# Altium PCB Charging Board.PcbDoc
Units mil, origin at the board's own origin, x right, y up, seen from the top; angles counter-clockwise.
Board outline 3410 x 1565 mil, 2 copper layers (Top Layer, Bottom Layer); 17 components, 14 nets, 45 pads, 2 vias.
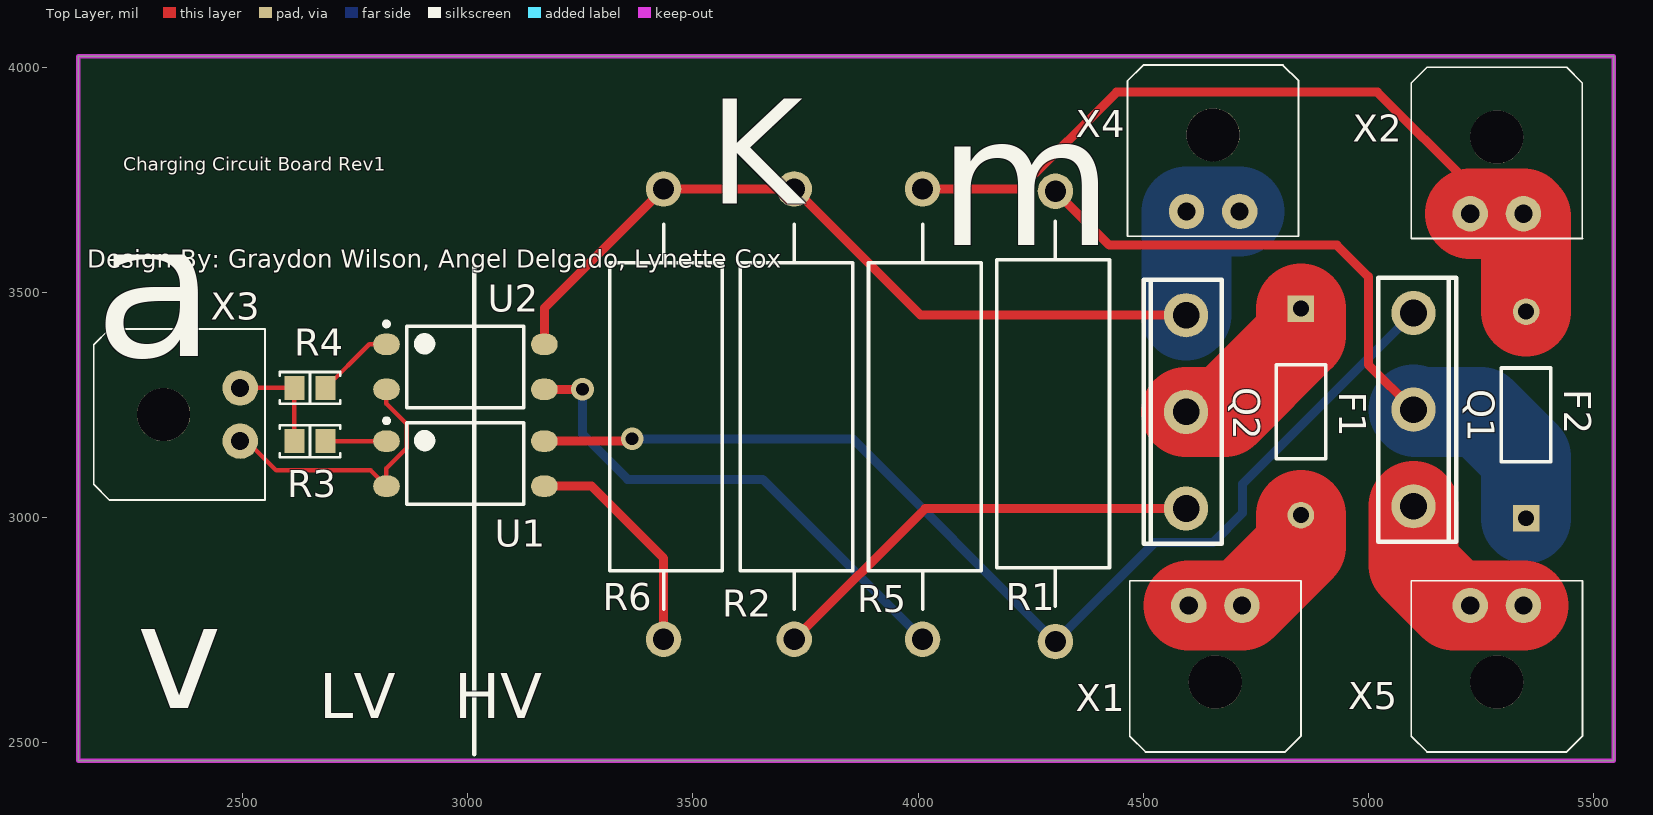
[diagram p0: Top Layer view]
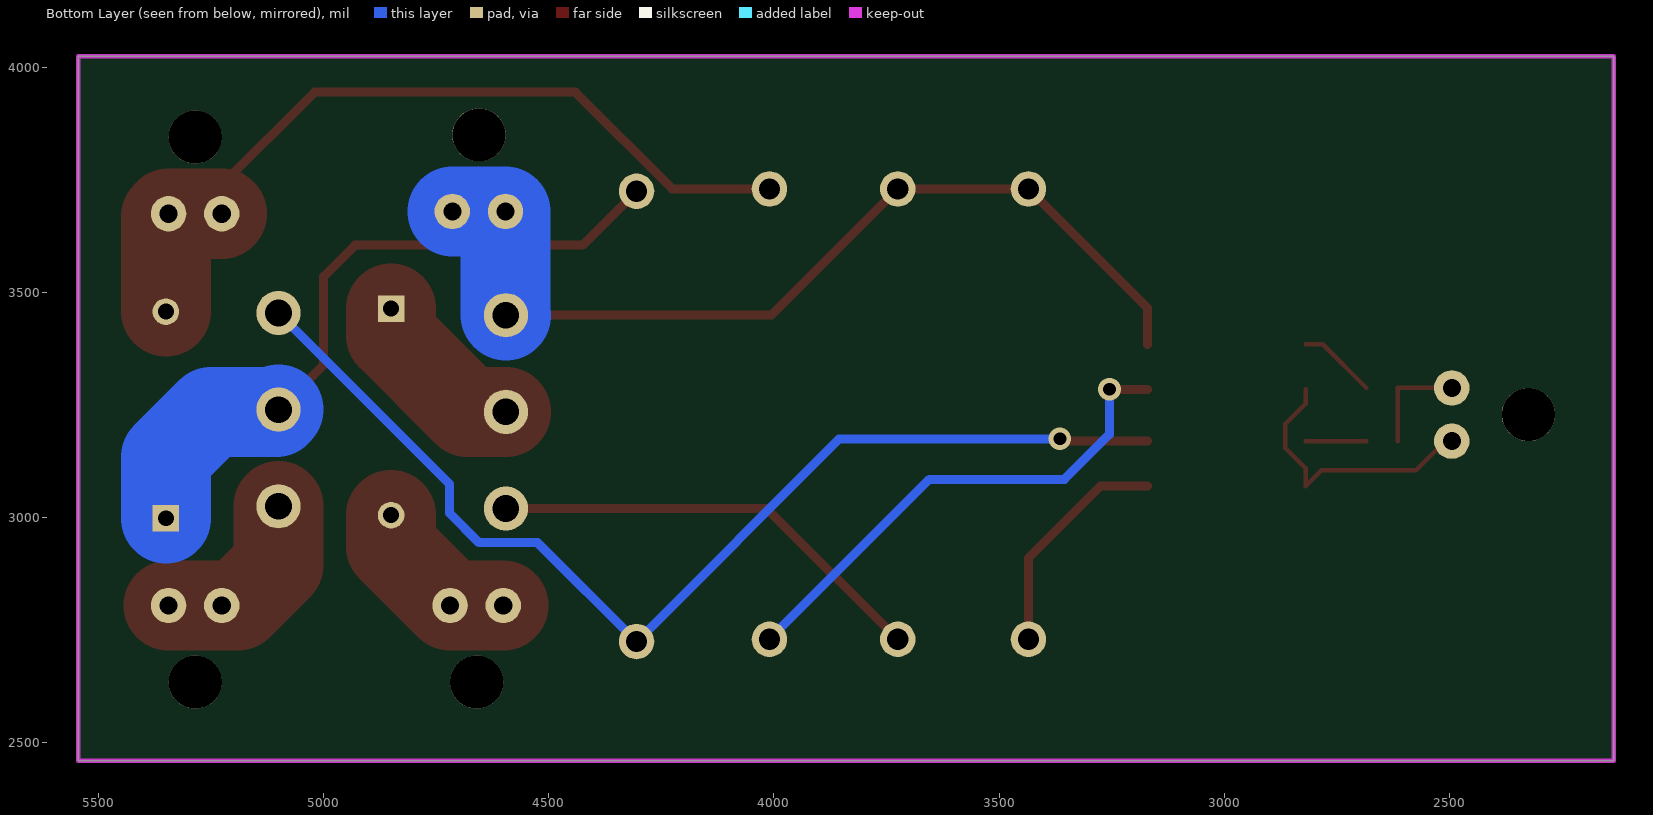
[diagram p1: Bottom Layer view, seen from below]

## Layer stack, top to bottom
Top Solder: solder mask 0.4, Solder Resist, Dk 3.5
Top Layer: signal copper 1.4
Dielectric 1: dielectric 12.6, FR-4, Dk 4.8
Bottom Layer: signal copper 1.4
Bottom Solder: solder mask 0.4, Solder Resist, Dk 3.5

## Board outline
2135,2460 5545,2460 5545,4025 2135,4025

## Design rules (kind name [scope] priority, off if disabled: settings)
Clearance [All] p1: gap=10 ignorepadtopadclearanceinfootprint=FALSE
PolygonConnect [All] p1: connectstyle=Relief reliefconductorwidth=10 reliefentries=4 polygonreliefangle="90 Angle" airgapwidth=10
RoutingVias [All] p1: holewidth=28 width=50 viastyle="Through Hole" minholewidth=28 minwidth=50 maxholewidth=28 maxwidth=50
SolderMaskExpansion [All] p1: expansion=4
Width [All] p1: maxlimit=200 minlimit=10 preferedwidth=10 minimp=50.000000 maximp=50.000000 favimp=50.000000
30 further rules are at their usual default settings.

## Components (designator, comment, footprint, x,y, rotation, side; value= is the part's Value field where it differs from the comment)
F1 "12A" PIN-W2/E2.8 4850,3235 r270 top value=6A
F2 "12A" PIN-W2/E2.8 5350,3228.11 r90 top value=6A
Q1 "STW20NK50Z" TO-247 5100,3025.43 r270 top value=N_Channel
Q2 "IXTH20P50P" TO-247 4595,3449.57 r90 top value=P_Channel
R1 "Resistor 2W TH" "Axial 25.4mm Pitch" 4305,2725 r90 top value=24k
R2 "Resistor 2W TH" "Axial 25.4mm Pitch" 3725,3730 r270 top value=24k
R3 "Resistor 820 0805 1/10W 10%" "RES 0805/2012" 2650,3170 r0 top value=880
R4 "Resistor 820 0805 1/10W 10%" "RES 0805/2012" 2650,3288.11 r0 top value=880
R5 "Resistor 2W TH" "Axial 25.4mm Pitch" 4010,3730 r270 top value=1M
R6 "Resistor 2W TH" "Axial 25.4mm Pitch" 3435,3730 r270 top value=1M
U1 "CPC1393" CPC1393GR 2995,3120 r0 top value=Null
U2 "CPC1393" CPC1393GR 2995,3335 r0 top value=Null
X1 "0436500200" "CONN 43650-0200 MOLEX 2PIN" 4660,2635 r0 top value=CONN
X2 "0436500200" "CONN 43650-0200 MOLEX 2PIN" 5285,3845 r180 top value=CONN
X3 "0436500200" "CONN 43650-0200 MOLEX 2PIN" 2324.92,3229.06 r270 top value=CONN
X4 "0436500200" "CONN 43650-0200 MOLEX 2PIN" 4655,3850 r180 top value=CONN
X5 "0436500200" "CONN 43650-0200 MOLEX 2PIN" 5285,2635 r0 top value=CONN

## Footprints (in the part's own frame and the unit in brackets; to place one, negate y for a bottom-side part, rotate by r counter-clockwise, add the part's x,y. Pads: shape width x height; smd on the part's side, far side on the other; paste and mask are expansions set on the pad)
"Axial 25.4mm Pitch" [mm]
  round 2 hole 1.2: 1(0,0) 2(25.4,0)
  silkscreen extent 2,-3.05 23.71,3.3
"CONN 43650-0200 MOLEX 2PIN" [mm] "MOLEX-43650-0200, 2PIN"
  round 2 hole 1.02: 1(-1.5,4.32) 2(1.5,4.32)
  round 3 hole 3 unplated: MH(0,0)
  silkscreen extent -4.82,-3.94 4.83,5.71
CPC1393GR [mm] "CPC1393GR, 4-Leads, Body 4.57x6.35mm, Pitch 2.54mm, IPC Medium Density"
  oval 1.5x1.2 smd: 1(-4.45,1.27) 2(-4.45,-1.27) 3(4.45,-1.27) 4(4.45,1.27)
  silkscreen extent -4.57,-2.3 3.3,2.54, body extent -4.76,-2.3 4.76,2.3, height 3.3
PIN-W2/E2.8 [mm] "Thru-Hole; 2 Leads"
  rect 1.5x1.5 hole 0.9: 1(-5.825,0)
  round 1.5 hole 0.9: 2(5.825,0)
  silkscreen extent -2.65,-1.4 2.65,1.4
"RES 0805/2012" [mm] "Chip Resistor, 2-Leads, Body 2.00x1.25mm, IPC Medium Density"
  rect 1.15x1.35 smd: 1(-0.875,0) 2(0.875,0)
  silkscreen extent -1.7,-0.9 1.7,0.9, body extent -0.95,-0.62 1.05,0.63, height 0.6
TO-247 [mm]
  round 2.5 hole 1.5: 1(-10.9,0) 2(-5.45,0) 3(0,0)
  silkscreen extent -12.9,-2 2,2.4

## Part data
F1 F2: library part 9, "Fuse", Manufacturer_id=1, MfrPartNo=2920L600/12MR, Drawer_id=1, I_hold=6A, I_max=50A, I_trip=12A, idFuse=9, LatestRevisionDate=17-Jul-2002, LatestRevisionNote="Re-released for DXP Platform.", Link=https://www.digikey.com/product-detail/en/littelfuse-inc/2920L600-12MR/F8137CT-ND/6234831, Name=2920L600/12MR, PackageDescription="Thru-Hole; 2 Leads", PackageReference=PIN-W2/E2.8, Published=8-Jun-2000, Publisher="Altium Limited", V_max=12V
Q1: library part 9, "N-Channel 500V 17A (Tc) 190W (Tc) Through Hole TO-247-3", Manufacturer_id=1, Package=TO-247, Power(Max)=190W, Supplier1PartNo=497-3261-5-ND, ComponentLink1Description=Null, ComponentLink1URL=https://www.digikey.com/product-detail/en/stmicroelectronics/STW20NK50Z/497-3261-5-ND/654635, Created_By=Lynette, Drawer_id=1, Id=17A, idFETs=9, Link=https://www.digikey.com/product-detail/en/stmicroelectronics/STW20NK50Z/497-3261-5-ND/654635, MfrPartNo=STW20NK50Z, Name=STW20NK50Z, Num_Circuits=1, Rds_On=Null, Supplier1=Digi-Key, Updated_By=Null, Vdss=500V, Vgs(Max)=None, Vgs(typ)=Null
Q2: library part 10, "P-Channel 500V 20A (Tc) 460W (Tc) Through Hole TO-247 (IXTH)", Manufacturer_id=1, Package=TO-247, Power(Max)=460W, Supplier1PartNo=IXTH20P50P-ND, ComponentLink1Description=Null, ComponentLink1URL=Null, Created_By=Lynette, Drawer_id=1, Id=20A, idFETs=10, Link=https://www.digikey.com/product-detail/en/ixys/IXTH20P50P/IXTH20P50P-ND/1995374, MfrPartNo=IXTH20P50P, Name=IXTH20P50P, Num_Circuits=1, Rds_On=Null, Supplier1=Digi-Key, Updated_By=Null, Vdss=500V, Vgs(Max)=None, Vgs(typ)=Null
R1 R2 R5 R6: library part 2707, "2W TH resistor", Manufacturer_id=1, Package=Axial, Power=2W, Supplier Part Number 1=Digi-Key, Tolerance=5%, ComponentLink1Description=Datasheet, Created_By=Graydon, Created_Date=2018-12-01, Drawer_id=1, idResistor=2707, Link=https://www.digikey.com/products/en/resistors/through-hole-resistors/53?FV=ffec4976, Name=PR02
R3 R4: library part 2412, Manufacturer_id=1, Package=0805, Power=1/10W, Tolerance=10%, ComponentLink1Description=Datasheet, Created_By="Nick Mah", Created_Date=2018-10-20, Drawer_id=1, idResistor=2412, Name=Res_820_0805_1/10W_10%, Supplier 1=Digi-Key
U1 U2: library part 26, "Solid State Relay SPST-NO (1 Form A) 4-SMD (0.300\", 7.62mm)", Manufacturer_id=1, MfrPartNo=CPC1393GRTR, Package=CPC1393GR, Supplier1PartNo=Null, ComponentLink1Description=Null, ComponentLink1URL=Null, Created_By=Lynette, Data_Rate=Null, Drawer_id=1, idIC_Misc=26, Link=https://www.digikey.com/product-detail/en/ixys-integrated-circuits-division/CPC1393GRTR/CLA270CT-ND/1277144, Name=CPC1393, Num_Circuits=1, Protocol=Null, Supplier1=Null, Type=Null, Updated_By=Null, Vin(Max)=Null, Vin(Min)=Null
X1 X2 X3 X4 X5: library part 9, Manufacturer_id=4, Supplier1PartNo=WM1860-ND, ComponentLink1Description=Datasheet, ComponentLink1URL=https://www.molex.com/pdm_docs/sd/436500200_sd.pdf, Created_By=Nick, Drawer_id=1, idConn=9, Link=https://www.digikey.com/product-detail/en/molex-llc/0436500200/WM1860-ND/268989, MfrPartNo=0436500200, Name="Molex 43650_0200", Num_Contacts=2, Num_Rows=1, Pitch="3 mm", Supplier1=Digi-Key

## Via types
v1: diameter 50, hole 28, Top Layer to Bottom Layer, 2 vias

## Nets (pads, with @x,y where several pads share a name; then routed paths per layer and width w, separated by ;. In a path a pad name is that pad's centre, name@x,y a point inside that pad or via, vN(x,y) a via of type N, cw(c..) or ccw(c..) an arc to the next point about the centre after c; other vN are vias at no path point)
"+ Battery": F1.2 X1.1 X1.2 | length 372.9
  Top Layer w200: X1.1 X1.2 4850,2936.02 F1.2
"+ Charger": Q2.3 R2.1 R6.1 U2.4 X4.1 X4.2 | length 2079.7
  Top Layer w20: U2.4 3170.2,3465.2 R6.1 R2.1 4005.43,3449.57 Q2.3
  Bottom Layer w200: Q2.3 4595.94,3450.51 X4.2 X4.1
"- Battery": Q1.3 X5.1 X5.2 | length 411.7
  Top Layer w200: Q1.3 5100,2895 5189.92,2805.08 X5.1 X5.2
"- Charger": F2.2 R5.1 X2.1 X2.2 | length 1792.5
  Top Layer w20: R5.1 4226.04,3730 4441.04,3945 5020,3945 5225.94,3739.06 X2.2
  Top Layer w200: X2.2 X2.1 5350,3668.98 F2.2
GND: U1.2 U2.2 X3.2 | length 618.1
  Top Layer w10: X3.2 2510,3170 2575,3105 2784.8,3105 U1.2 2819.8,3109.47 2864.33,3154 2864.33,3208.62 2819.8,3253.15 U2.2
NetF1_1: F1.1 Q2.2 | length 384.7
  Top Layer w200: Q2.2 4680,3235 4850,3405 F1.1
NetF2_1: F2.1 Q1.2 R1.2 | length 1539.8
  Top Layer w20: R1.2 4425,3605 4930,3605 5000,3535 5000,3340 Q1.2
  Bottom Layer w200: Q1.2 5105,3235 5250,3235 5350,3135 F2.1
NetQ1_1: Q1.1 R1.1 U1.4 | length 2458.3
  Top Layer w20: U1.4 3360,3170 v1(3365,3175)
  Bottom Layer w20: v1(3365,3175) 3855,3175 R1.1 4525,2945 4655,2945 4720,3010 4720,3074.57 Q1.1
NetQ2_1: Q2.1 R2.2 | length 990.3
  Top Layer w20: R2.2 4015.43,3020.43 Q2.1
NetR3_2: R3.2 U1.1 | length 135.4
  Top Layer w10: R3.2 U1.1
NetR4_2: R4.2 U2.1 | length 175.5
  Top Layer w10: R4.2 2781.34,3385 U2.1
NetR5_2: R5.2 U2.3 | length 1128.3
  Top Layer w20: U2.3 v1(3255,3285)
  Bottom Layer w20: v1(3255,3285) 3255,3185 3355,3085 3655,3085 R5.2
NetR6_2: R6.2 U1.3 | length 511.1
  Top Layer w20: U1.3 3275,3070 3435,2910 R6.2
"TS Ready": R3.1 R4.1 X3.1 | length 238.7
  Top Layer w10: X3.1 R4.1 R3.1
pads on no net: X1.MH X2.MH X3.MH X4.MH X5.MH

## Keep-outs
Keep-Out Layer:
  the board outline again, w10

## Silkscreen, mask and mechanical layers (free items; w line width, h text height)
Top Overlay:
  lines w10: 3015,2475 3015,3560
  text "Charging Circuit Board Rev1" at 2235,3770 h30
  text "K" at 3535,3620 h400
  text "Design By: Graydon Wilson, Angel Delgado, Lynette Cox" at 2155,3555 h40
  text "m" at 4045,3510 h500
  text "a" at 2170,3210 h787.4
  text "LV   HV" at 2670,2555 h100
  text "v" at 2265,2500 h400